# Altium PCB MIFA.PcbDoc (part 4 of 5)
Units mm, origin at the board's own origin, x right, y up, seen from the top; angles counter-clockwise.
Board outline 61 x 65 mm, 6 copper layers (Top Layer, Mid-Layer 1, Mid-Layer 2, Mid-Layer 3, Mid-Layer 4, Bottom Layer), stack 1.538 mm thick; 269 components, 171 nets, 1183 pads, 797 vias.
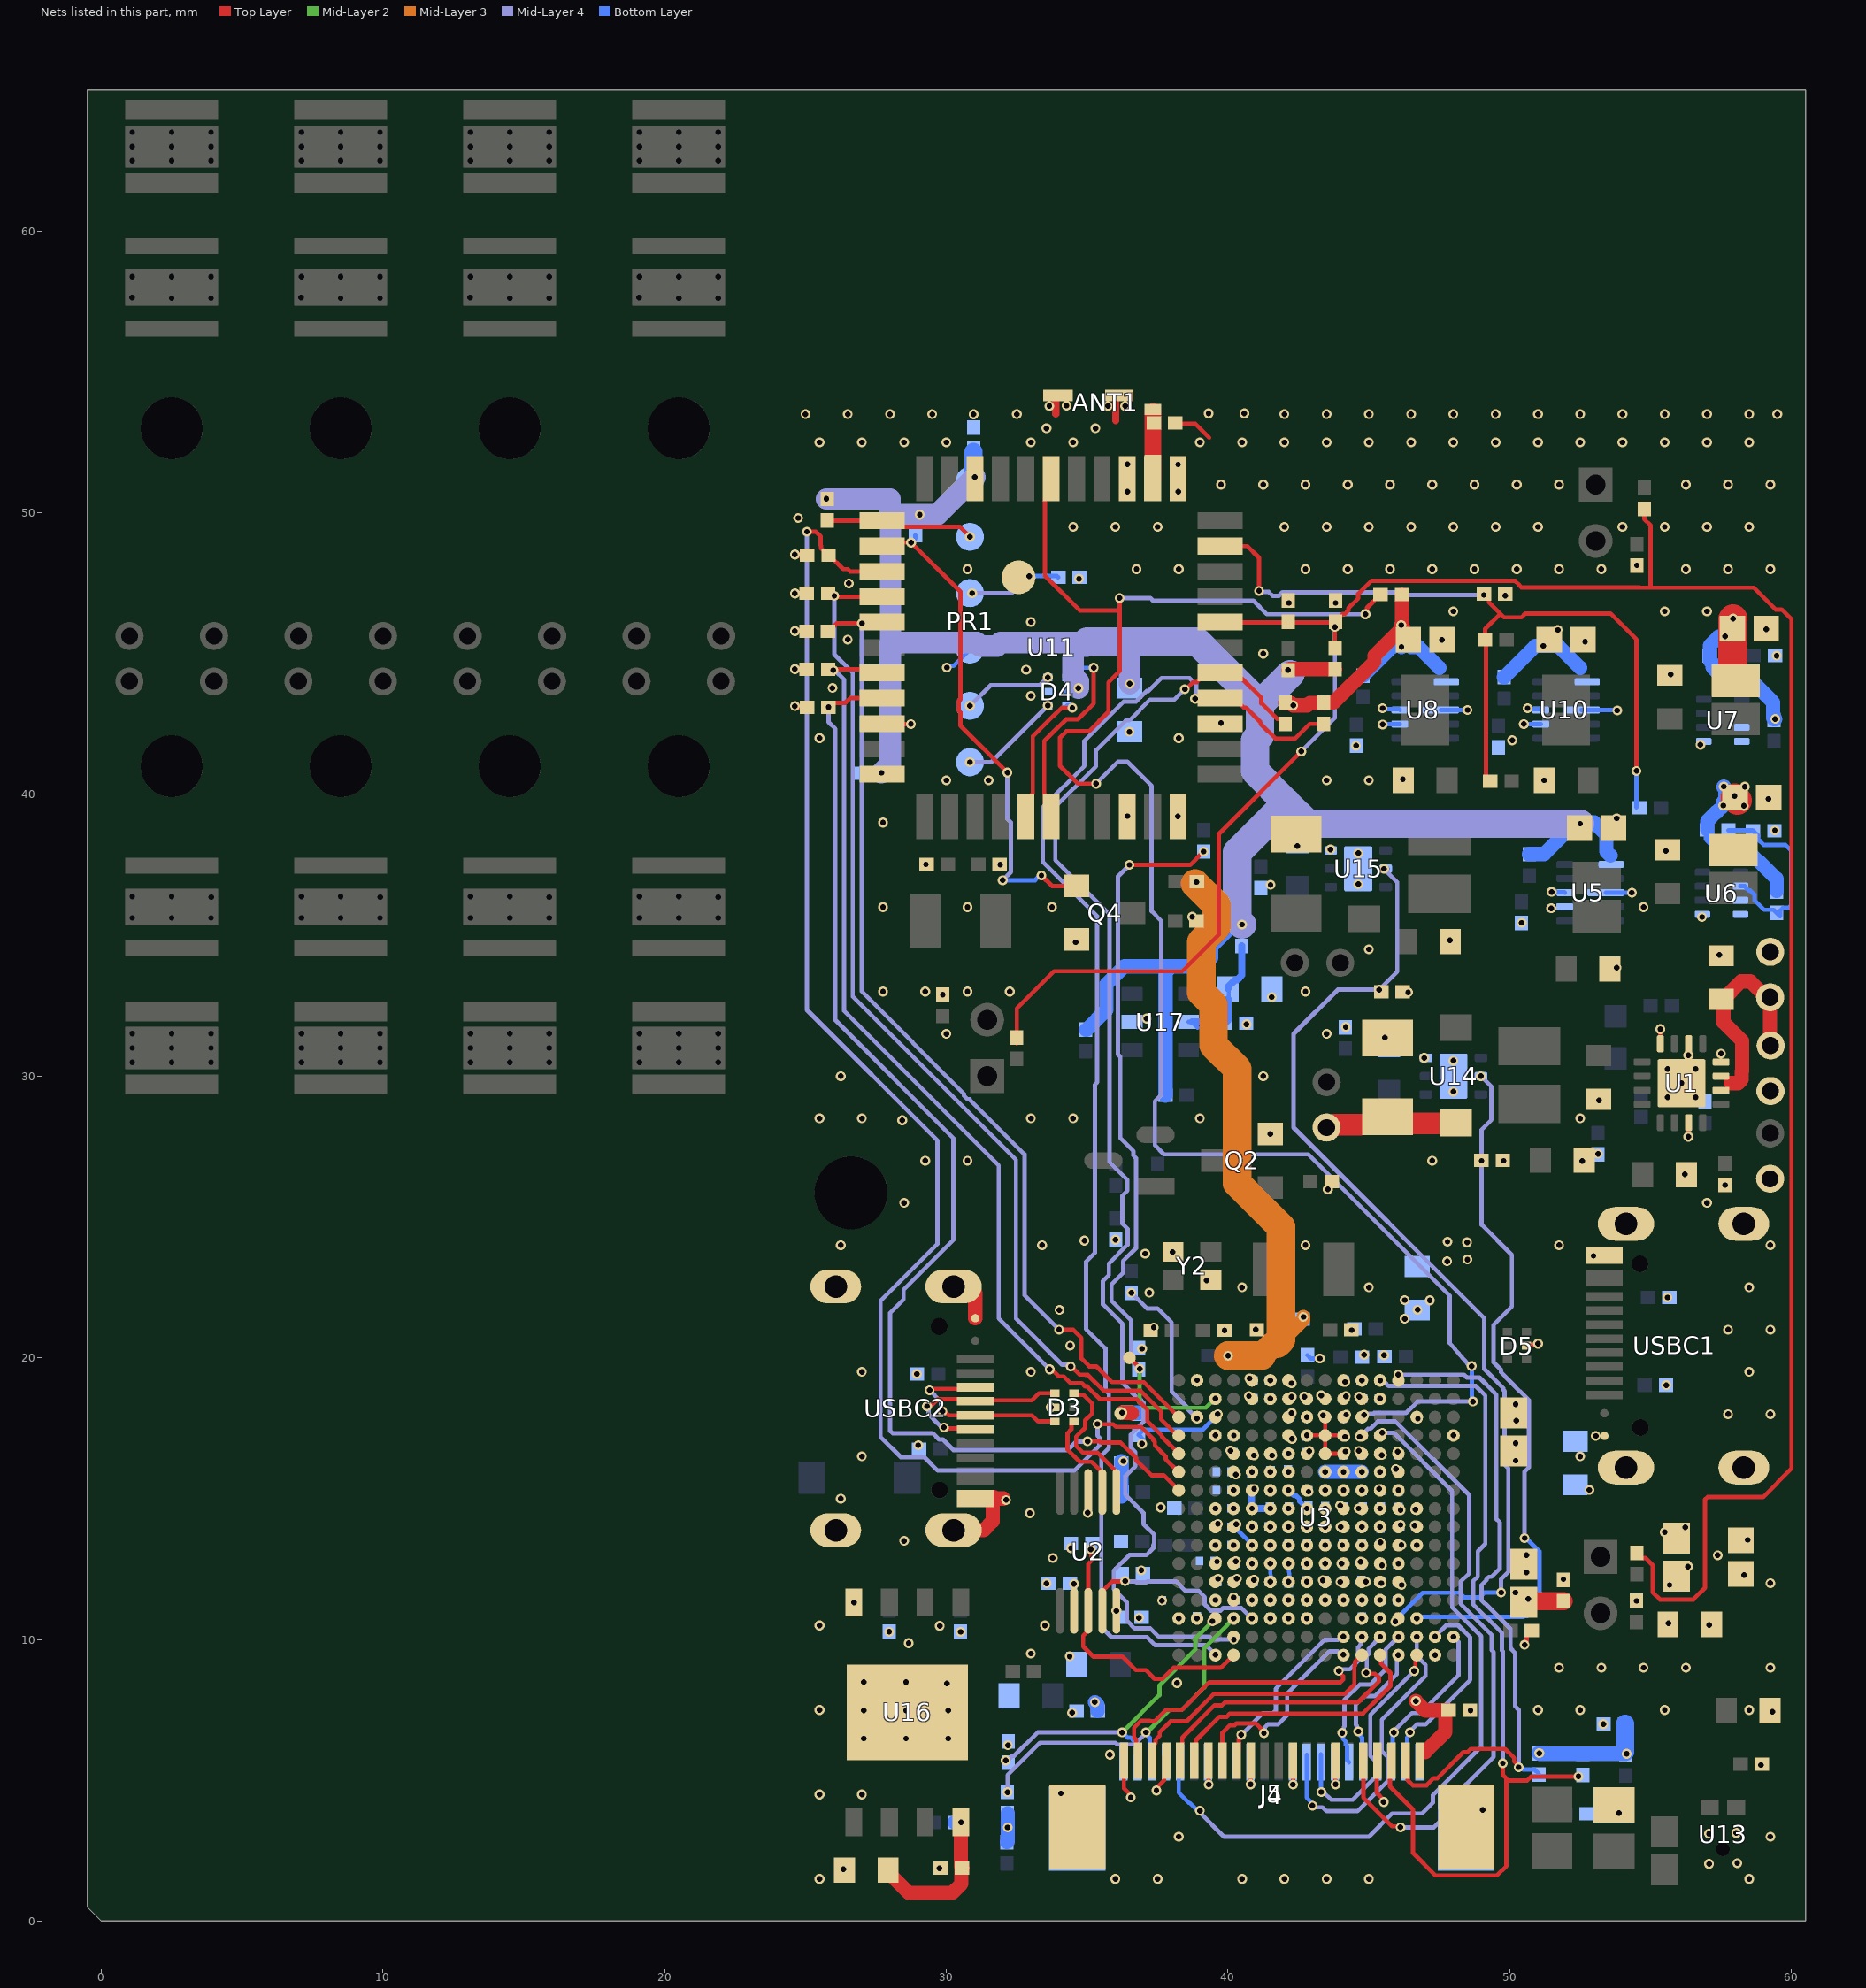
[diagram p6: the nets of this part, all layers, seen from the top]

## Via types
v1: diameter 0.35, hole 0.2, Top Layer to Bottom Layer, tented both sides, 788 vias
v2: diameter 0.35, hole 0.2, Top Layer to Bottom Layer, 9 vias

## Nets (pads, with @x,y where several pads share a name; then routed paths per layer and width w, separated by ;. In a path a pad name is that pad's centre, name@x,y a point inside that pad or via, vN(x,y) a via of type N, cw(c..) or ccw(c..) an arc to the next point about the centre after c; other vN are vias at no path point) (continued)
GND: (continued)
  other v1: 25.5,1.5 36,1.5 37.5,1.5 40.5,1.5 42,1.5 43.5,1.5 45,1.5 58.5,1.5 26.351,1.846 29.752,1.878 57.077,2.034 58.075,2.06 38.25,3 59.25,3 57.072,3.105 58.042,3.133 53.877,3.839 49.035,3.947 25.5,4.5 27,4.5 34.065,4.538 58.914,5.544 27.068,6.486 28.568,6.486 30.068,6.486 53.323,6.995 34.466,7.399 59.326,7.437 27.068,7.486 28.568,7.486 30.068,7.486 48.607,7.484 25.5,7.5 51,7.5 52.5,7.5 55.5,7.5 58.5,7.5 30.025,8.443 38.187,8.456 27.068,8.486 28.568,8.486 51.75,9 53.25,9 54.75,9 56.25,9 59.25,9 34.379,9.402 47.35,9.451 33,9.5 28.662,9.87 29.766,10.483 25.5,10.5 33.5,10.5 57.074,10.518 38.249,10.749 38.899,10.749 41.5,10.749 42.148,10.749 42.798,10.749 44.749,10.749 45.399,10.749 36.839,10.77 26.721,11.311 54.508,11.37 37.657,11.382 39.549,11.399 40.85,11.399 42.148,11.399 43.448,11.399 46.049,11.399 33.559,11.994 45.443,11.997 59.25,12 42.798,12.049 43.985,12.044 44.898,12.049 43.362,12.105 40.918,12.116 51.906,12.14 39.645,12.155 58.32,12.294 46.049,12.7 40.275,12.78 33.778,12.892 57.381,12.989 40.2,13.35 42.798,13.35 43.448,13.35 44.052,13.348 44.749,13.35 46.157,13.352 46.699,13.35 45.414,13.447 28.5,13.5 41.5,14 42.148,14 46.625,14.048 39.639,14.104 32.967,14.488 35.02,14.497 46.127,14.598 46.647,14.613 40.2,14.65 43.448,14.65 44.633,14.651 45.399,14.65 37.606,14.692 43.978,14.758 32.12,14.955 26.25,15 41.5,15.3 40.85,15.951 45.4,15.952 27,16.5 52.5,16.5 41.566,16.534 40.921,16.536 45.463,16.547 42.148,16.601 46.02,16.668 44.644,16.697 29.005,16.899 42.272,17.122 40.204,17.244 53.057,17.227 39.549,17.249 48,17.249 46.738,17.839 44.193,17.981 57.75,18 59.25,18 42.258,18.04 42.254,18.617 40.741,18.642 42.709,18.62 44.18,18.637 44.657,18.623 43.305,18.665 55.556,19.028 42.252,19.098 44.155,19.144 38.9,19.207 40.761,19.267 28.954,19.425 27,19.5 33,19.5 58.5,19.5 36.946,20.322 34.394,20.434 39.875,20.976 40.981,21.003 44.396,20.982 57.75,21 59.25,21 37.363,21.079 34.014,21.7 55.6,22.141 37.205,22.311 40.5,22.5 45,22.5 58.5,22.5 39.24,22.749 52.973,23.618 37.058,23.698 38.029,23.748 26.25,24 33.396,24 42.75,24 51.75,24 59.25,24 34.9,24.162 36.006,24.193 28.5,25.5 57,25.5 57.64,26.132 56.218,26.512 49.786,26.995 52.574,26.984 29.25,27 30.75,27 47.25,27 53.133,27.244 41.5,27.95 28.434,28.434 25.5,28.5 27,28.5 33,28.5 34.5,28.5 39,28.5 52.5,28.5 53.171,29.135 26.25,30 41.25,30 46.967,30.648 56.34,30.74 57.501,30.799 45.564,31.372 30,31.5 43.5,31.5 44.177,31.746 40.656,31.842 37.108,32.044 41.552,32.805 29.872,32.887 46.393,32.974 27.75,33 29.25,33 30.75,33 32.25,33 42.75,33 53.792,33.851 57.437,34.305 45,34.5 34.591,34.753 47.871,34.82 50.425,35.445 38.73,35.657 56.825,35.65 51.473,35.957 27.75,36 30.75,36 33.75,36 54.75,36 41.51,36.79 31.914,37.512 29.275,37.517 55.536,38.002 43.635,38.046 42.455,38.165 59.41,38.726 27.75,39 53.797,39.15 36.432,39.228 38.221,39.218 59.182,39.842 30,40.5 31.5,40.5 43.5,40.5 45,40.5 51.225,40.5 46.206,40.542 44.545,41.731 56.768,41.766 50.087,41.923 25.5,42 38.25,42 36.5,42.225 39.749,42.532 53.817,42.982 33,43.5 25.956,43.781 55.709,44.266 32.831,44.432 59.474,44.926 41.25,45 52.675,45.425 26.5,45.5 47.589,45.492 59.102,45.87 33,46.124 48,46.5 55.5,46.5 57,46.5 42.155,46.8 43.816,46.8 49.835,47.053 26.54,47.493 34.707,47.658 30.75,48 36.75,48 38.25,48 42.75,48 44.25,48 45.75,48 47.25,48 48.75,48 50.25,48 51.75,48 53.25,48 56.25,48 57.75,48 59.25,48 54.514,48.133 34.5,49.5 36,49.5 37.5,49.5 42,49.5 43.5,49.5 45,49.5 46.5,49.5 48,49.5 49.5,49.5 51,49.5 54,49.5 55.5,49.5 57,49.5 58.5,49.5 24.739,49.815 36.423,50.751 38.23,50.751 39.75,51 41.25,51 42.75,51 44.25,51 45.75,51 47.25,51 48.75,51 50.25,51 51.75,51 56.25,51 57.75,51 59.25,51 38.226,51.712 36.423,51.719 25.5,52.5 27,52.5 28.5,52.5 30,52.5 33,52.5 34.5,52.5 39,52.5 40.5,52.5 42,52.5 43.5,52.5 45,52.5 46.5,52.5 48,52.5 49.5,52.5 51,52.5 52.5,52.5 54,52.5 55.5,52.5 57,52.5 58.5,52.5 33.553,53 35.293,53 25,53.5 26.5,53.5 28,53.5 29.5,53.5 30.966,53.497 32.5,53.5 42,53.5 43.5,53.5 45,53.5 46.5,53.5 48,53.5 49.5,53.5 51,53.5 52.5,53.5 54,53.5 55.5,53.5 57,53.5 58.5,53.5 59.5,53.5 39.308,53.528 40.578,53.528 33.658,53.791 35.735,53.791 36.351,53.791 34.264,53.801
  other v2: 55.6,29.25 56.6,29.25 48,29.45 56.1,29.75 55.6,30.25 56.6,30.25 48,30.55 44.621,36.813 44.621,37.913
K230_ALIVE: R32.1 U3.L14 U11.6 | length 61.9
  Top Layer w0.152: U11.6@33.721,51.217 33.721,50.717 33.5,50.496 33.5,47.77 34.734,46.535 36.15,46.535 v1(36.15,46.977) ; v1(35.318,40.383) 34.669,40.383 34.034,41.017 34.034,42.019 34.256,42.241 35.058,42.241 35.751,42.934 35.751,43.974 36.15,44.373 36.15,46.473 ; v1(44.875,46.4) 44.932,46.457 44.932,46.626 45.398,47.092 R32.1@45.419,47.092
  Mid-Layer 4 w0.152: v1(35.318,40.383) 36.099,41.164 36.421,41.164 37.287,40.298 37.287,35.854 37.621,35.52 37.621,29.324 37.4,29.103 37.4,27.55 37.725,27.225 42.847,27.225 47.872,22.2 47.872,20.578 47.872,20.52 47.91,20.477 48.61,19.673 48.615,19.673 v1(48.645,19.704) ; v1(36.15,46.977) 37.239,46.977 37.338,46.878 40.9,46.878 41.378,46.4 v1(44.875,46.4) ; v1(44.828,17.974) 44.866,18.012 45.155,18.012 45.186,18.044 46.322,18.044 46.726,18.447 v1(48.692,18.447)
  Bottom Layer w0.152: v1(48.645,19.704) 48.657,19.692 48.657,18.482 v1(48.692,18.447)
K230_PWR: R19.2 R27.2 R28.2 R51.2 U11.43 | length 29.3
  Top Layer w0.152: U11.43@39.72,48.817 40.683,48.817 41.099,48.401 v1(41.099,47.226) ; R28.2@49.125,45.494 49.125,45.875 49.668,46.419 ; R28.2@49.143,45.5 49.159,45.484 49.159,40.625 R27.2@49.307,40.477 ; R19.2@49.143,47.08 49.259,46.963 49.259,46.828 49.668,46.419 ; 49.797,46.29 49.734,46.353 49.668,46.419 ; 49.798,46.29 50.419,46.29 50.555,46.426 53.574,46.426 54.5,45.5 v1(54.5,40.836)
  Mid-Layer 4 w0.152: v1(41.099,47.226) 41.137,47.188 41.443,47.188 41.579,47.053 41.804,47.053 41.928,47.177 46.338,47.177 46.435,47.08 v1(49.076,47.08)
  Bottom Layer w0.152: R51.2@54.5,39.54 v1(54.5,40.836)
K230_RSTN: Q4.1 R76.1 U11.13 | length 17.9
  Top Layer w0.152: U11.13@27.721,48.817 27.848,48.943 v1(28.751,48.943) ; v1@28.751,48.884 28.81,48.884 30.5,47.194 30.5,43.375 30.437,43.312 30.437,42.98 30.5,42.917 30.5,42.444 v1(32.169,40.776) ; v1(33.375,37.125) 33.751,36.749 Q4.1@34.622,36.749
  Mid-Layer 4 w0.152: v1(32,36.955) 32.29,37.245 32.29,39.005 32.169,39.127 v1(32.169,40.776)
  Bottom Layer w0.152: v1(28.751,48.943) 28.899,49.092 R76.1@28.899,49.205 ; v1(32,36.955) 33.151,36.955 33.321,37.125 v1(33.375,37.125) ; v1(32.169,40.776) v1@32.224,40.776
LEAK_SENS: C109.2 R71.2 R72.1 RB1.2 RB3.2 RB5.2 U11.40 | length 88.2
  Top Layer w0.152: RB3.2@32.5,31.161 32.5,32.4 33.825,33.725 38.375,33.725 39.675,35.025 39.675,38.6 v1(42.6,41.525) ; U11.40@39.72,46.117 39.727,46.11 42.137,46.11 43.792,46.11 R72.1@43.81,46.128 ; R71.2@43.795,45.216 v1(43.795,45.948) 43.81,45.964 R72.1@43.81,46.128 ; 54.603,47.353 50.411,47.353 50.322,47.442 50.322,47.447 50.19,47.58 45.084,47.58 44.844,47.34 44.84,47.34 44.623,47.123 44.623,46.962 44.273,46.612 44.273,46.533 44.14,46.401 44.062,46.401 43.81,46.149 R72.1@43.81,46.128 ; RB1.2@54.611,13.092 54.611,12.957 54.671,12.898 54.819,12.898 55.075,12.642 55.075,11.676 55.331,11.42 56.519,11.42 56.93,11.831 56.93,14.969 57.019,15.058 57.806,15.058 58.99,15.058 60,16.069 60,46.22 59.654,46.566 59.434,46.566 58.66,47.34 55,47.34 ; 54.611,47.34 55,47.34 ; RB5.2@54.773,50.139 54.773,49.777 55,49.55 55,47.34
  Mid-Layer 4 w0.152: v1(42.6,41.525) 43.795,42.72 v1(43.795,45.948)
LED_CTL1: R67.1 U3.N3 U15.5 | length 36
  Mid-Layer 4 w0.152: v1(45.536,37.358) 46.007,36.887 46.007,33.715 v1(45.362,33.07) 43.895,33.07 42.326,31.501 42.326,28.174 49.084,21.416 49.084,19.615 49.767,18.932 49.767,18.869 49.819,18.816 49.819,16.204 49.948,16.076 49.948,12.395 49.696,12.143 v1(49.696,11.669)
  Bottom Layer w0.152: v1(45.536,37.358) U15.5@45.676,37.358 ; v1(45.937,10.634) 45.937,10.685 46.911,11.658 48.218,11.658 48.376,11.5 48.925,11.5 49.094,11.669 v1(49.696,11.669)
LED_CTL2: R3.1 U3.P3 U14.5 | length 25.2
  Mid-Layer 4 w0.152: v1(48.975,30) 49.35,29.625 49.35,28.451 49.001,28.102 v1(49.001,26.995) 49.001,24.724 50.075,23.65 50.075,21.823 49.425,21.173 49.425,19.835 49.692,19.567 49.692,19.483 50.004,19.171 50.347,18.823 50.378,18.792 50.391,18.792 50.421,18.762 50.677,18.506 50.677,16.107 50.528,15.958 v1(50.528,13.6)
  Bottom Layer w0.152: v1(46.7,10.746) 46.738,10.784 46.869,10.784 46.888,10.803 50.49,10.803 50.523,10.837 50.614,10.837 51.055,11.277 51.055,13.129 50.584,13.6 v1(50.528,13.6) ; v1(48.975,30) U14.5@49.05,30 ; v1(49.001,26.995) v1@49.011,26.995
NetANT1_1: ANT1.1 CT1.1 pad.GND1 U11.2 | length 3.1
  Top Layer w0.55: pad.GND1@37.331,51.255 U11.2@37.344,51.242
  Top Layer w0.599: U11.2@37.33,51.224 ANT1.1@37.33,53.594 ; 37.33,52.094 37.331,52.095 37.331,52.77
NetC1_1: C1.1 D7.1 J1.1 | length 5
  Top Layer w0.152: D7.1@47.826,28.551 D7.1@48.03,28.348
  Top Layer w0.762: J1.1@43.496,28.175 43.541,28.22 43.709,28.22 43.761,28.272 44.688,28.272 44.697,28.28 45.385,28.28 C1.1@45.657,28.551 45.882,28.326 D7.1@48.008,28.326
NetC4_1: C4.1 C9.2 R52.2 U17.2 | length 5
  Bottom Layer w0.152: U17.2@38.597,31.922 38.722,31.922 U17.2@38.918,31.727 ; C4.1@40.026,32.852 40.026,33.15 40.304,33.429 C4.1@40.337,33.429
  Bottom Layer w0.254: U17.2@38.722,31.922 39.94,31.922 40,31.982 C4.1@40,32.745 ; C4.1@40.006,33.1 40.006,33.175 40.254,33.423 40.329,33.423 40.494,33.588 R52.2@40.494,34.624
NetC21_2: C21.2 R25.1 R49.2 U6.2 | length 7.2
  Bottom Layer w0.152: R25.1@57.758,38.73 58.612,38.73 58.634,38.707 58.656,38.707 58.816,38.547 58.816,38.412 59.023,38.205 59.546,38.205 59.793,38.205 59.994,38.004 59.994,36.073 59.896,35.974 59.697,35.974 59.596,35.873 59.596,35.675 59.364,35.907 59.028,35.907 58.691,36.243 58.691,36.434 58.53,36.596 58.478,36.596 58.389,36.685 58.389,36.696 58.34,36.745 U6.2@58.19,36.745